# Altium PCB 2018_PanneauDomotiqueSimple.PcbDoc
Units mil, origin at the board's own origin, x right, y up, seen from the top; angles counter-clockwise.
Board outline 2010 x 830 mil, 4 copper layers (1-TOP, 2-SIGNAL, 3-GND, 4-BOT), stack 68 mil thick; 7 components, 5 nets, 17 pads, 2 vias.
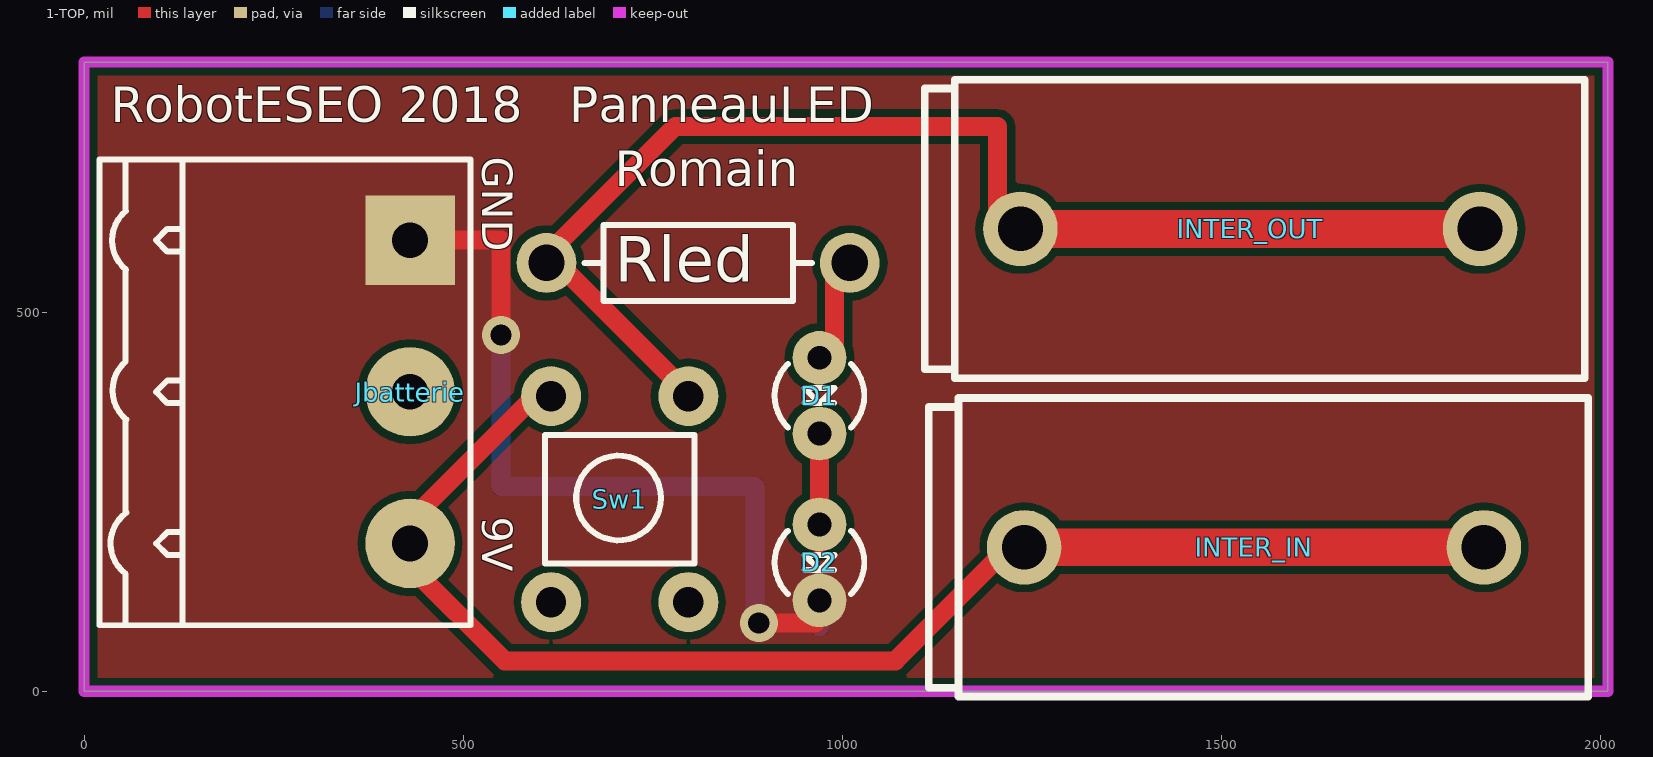
[diagram p0: 1-TOP view]
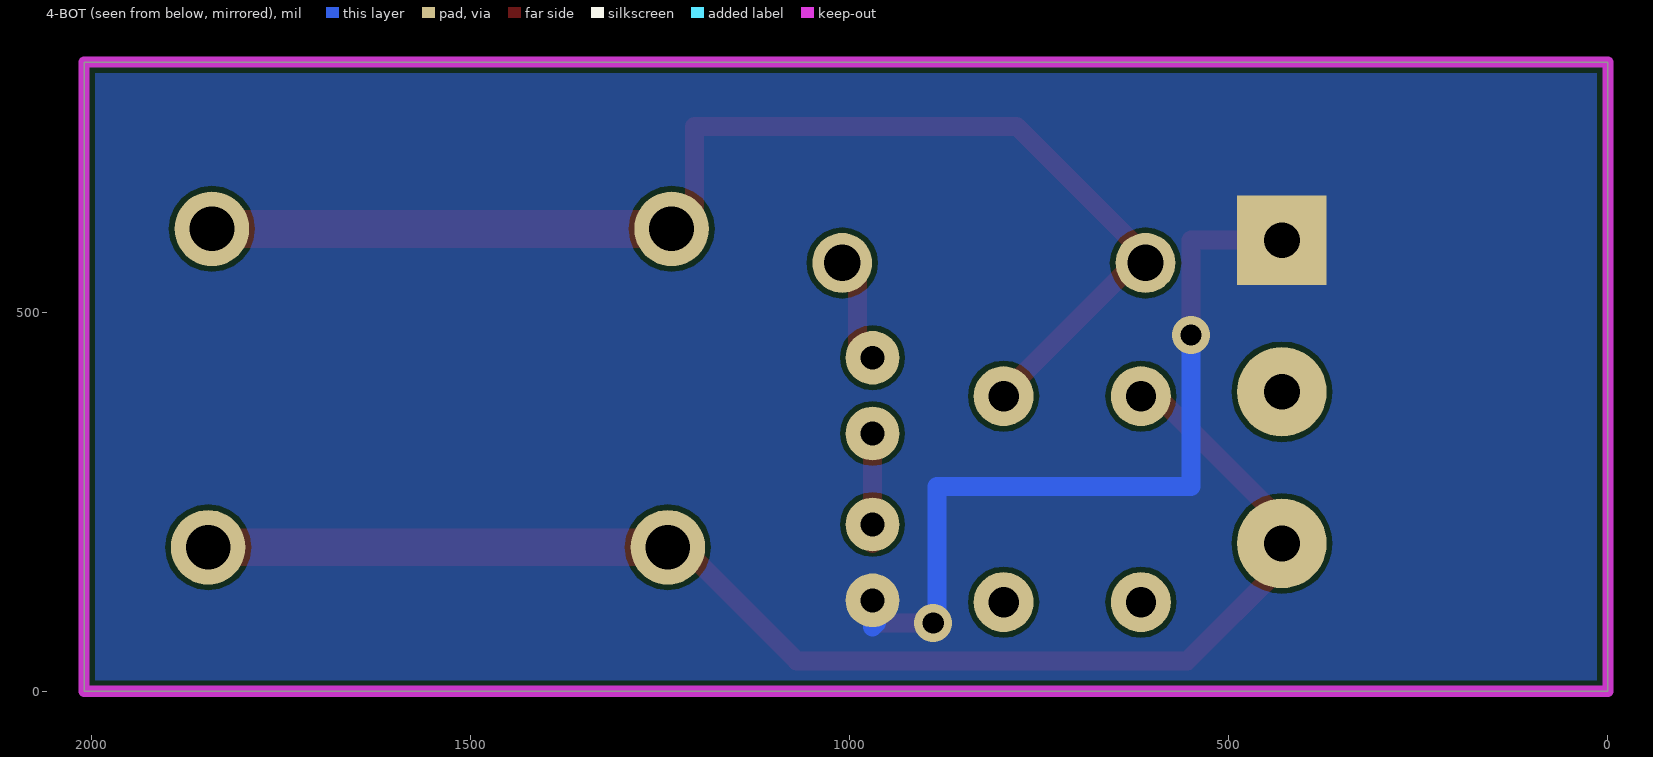
[diagram p1: 4-BOT view, seen from below]
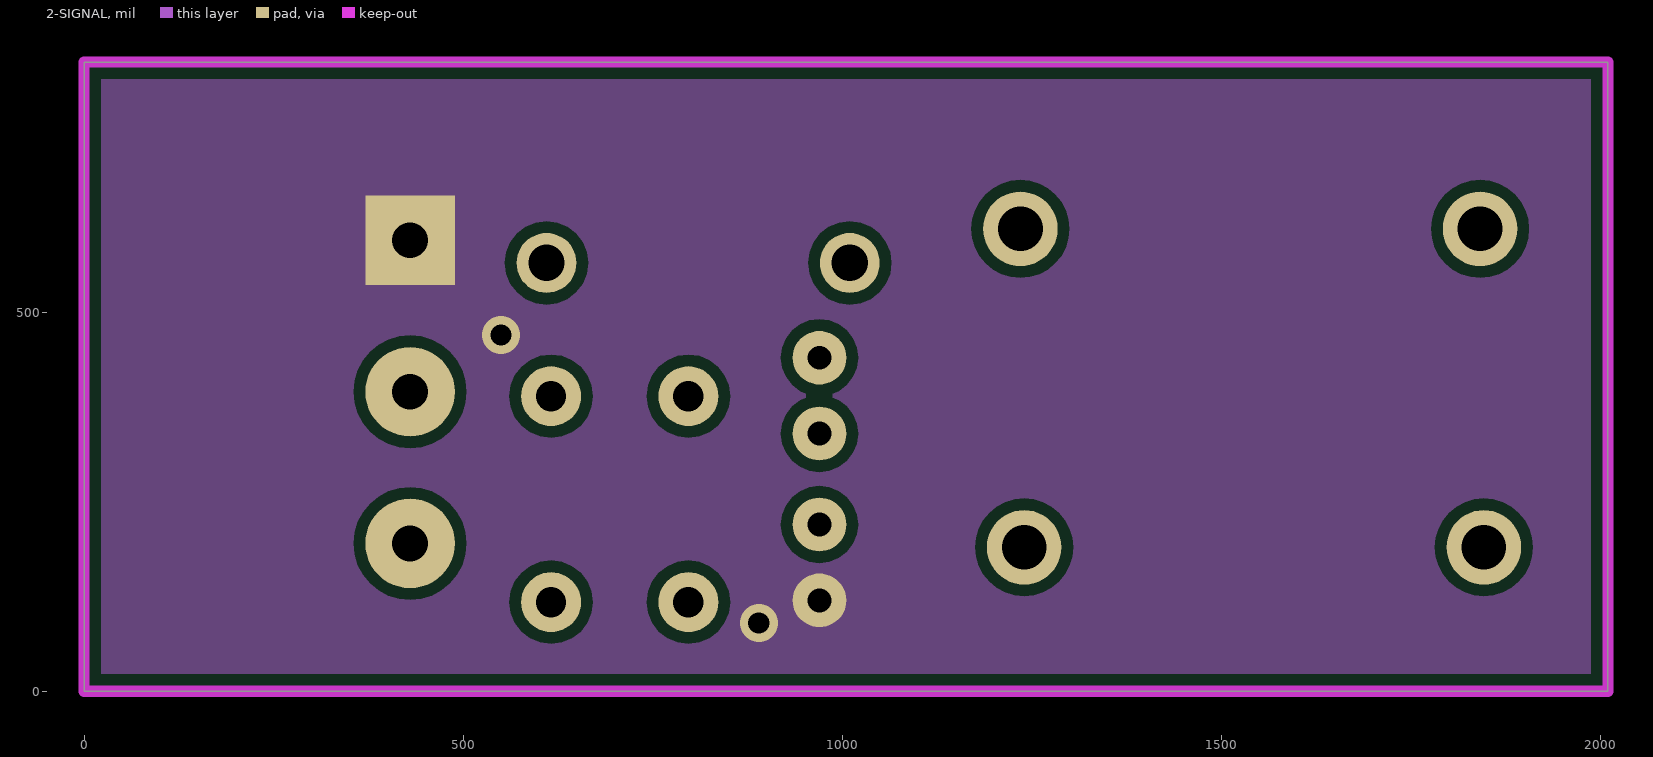
[diagram p2: 2-SIGNAL]
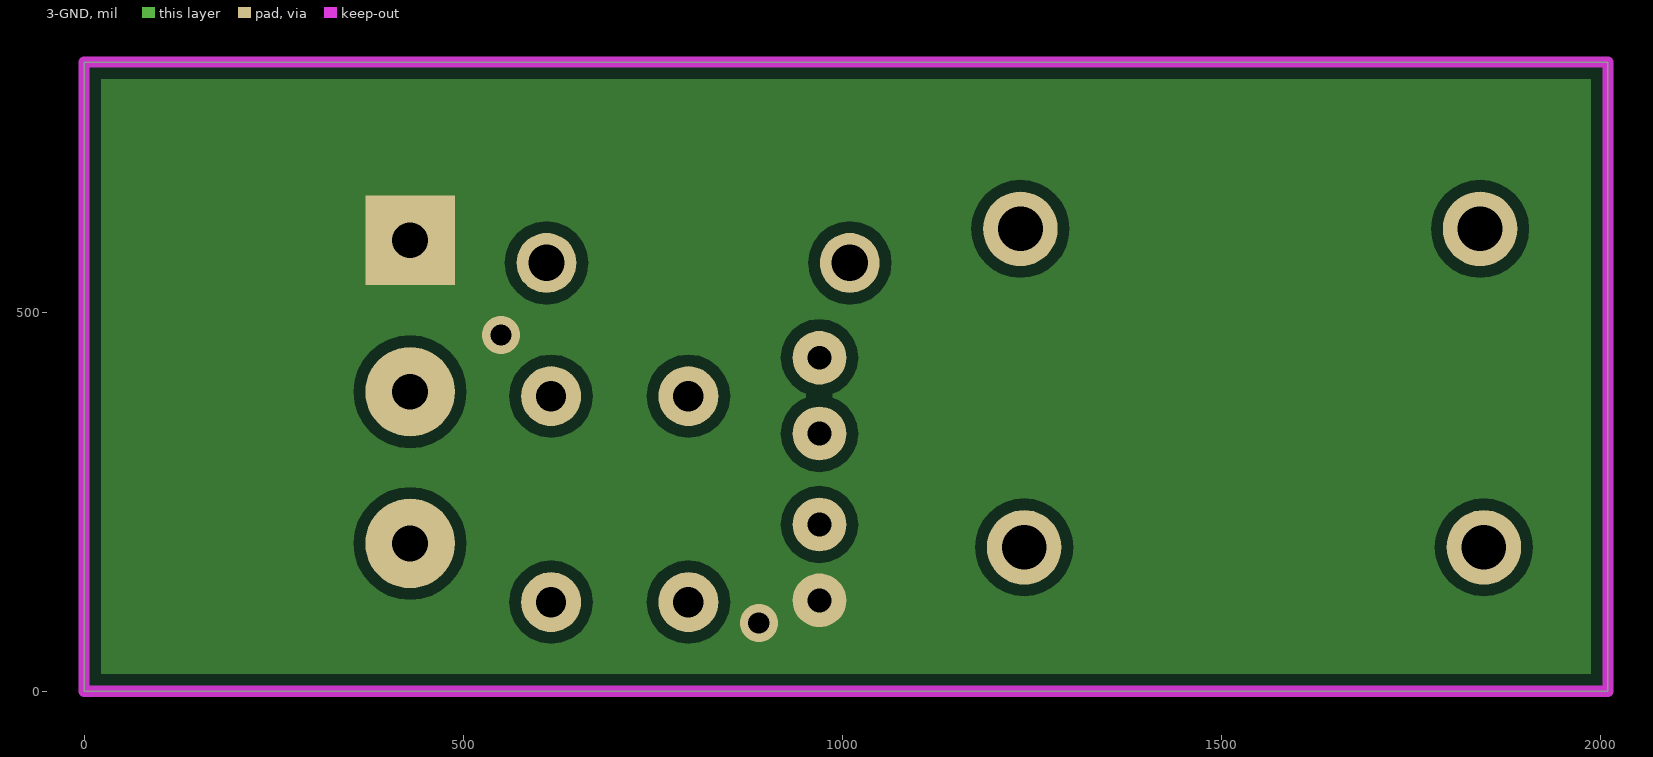
[diagram p3: 3-GND]
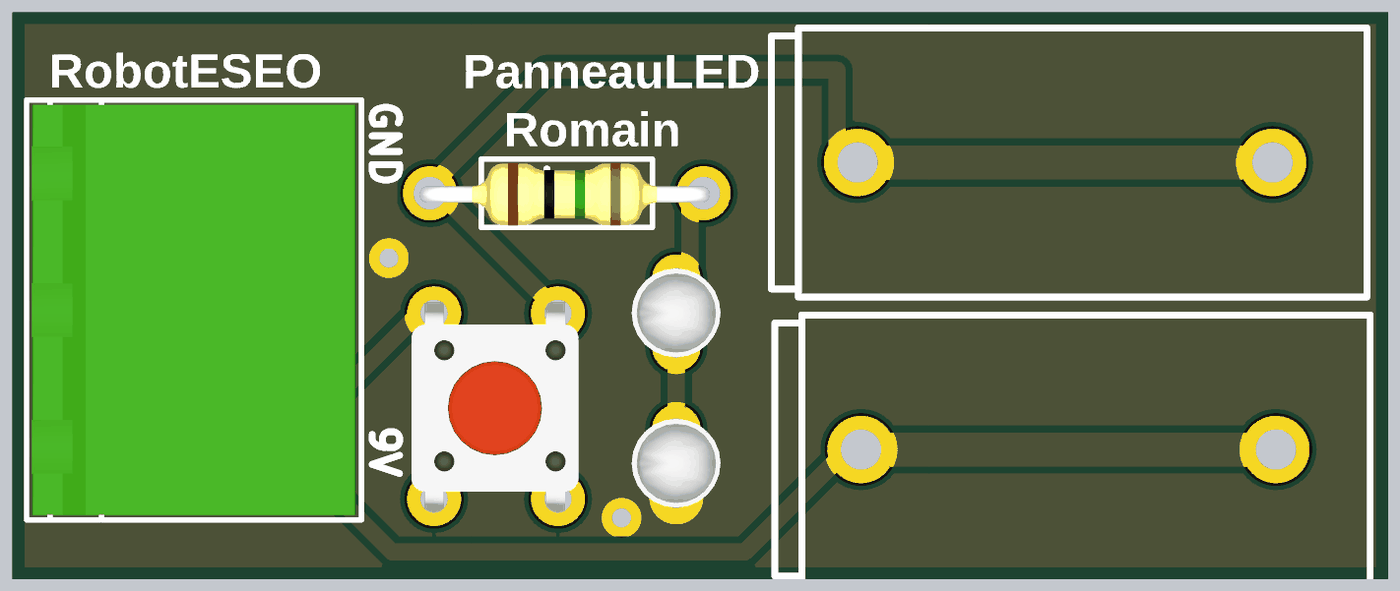
[diagram p4: 3D render of the assembled board from above, using the file's embedded part models]

## Layer stack, top to bottom
Top Solder: solder mask 0.4, Solder Resist, Dk 3.5
1-TOP: signal copper 1.4
Dielectric1: core 20.8, FR-4, Dk 4.8
2-SIGNAL: signal copper 1.4
Dielectric2: prepreg 20.8, FR-4, Dk 4.8
3-GND: signal copper 1.4
Dielectric3: core 20.8, FR-4, Dk 4.8
4-BOT: signal copper 1.4
Bottom Solder: solder mask 0.4, Solder Resist, Dk 3.5

## Board outline
0,0 2010,0 2010,830 0,830

## Design rules (kind name [scope] priority, off if disabled: settings)
Clearance Clearance_4 [InNamedPolygon('GND_TOP') Or  InNamedPolygon('3-GND') Or  InNamedPolygon('2-GND') Or  InNamedPolygon('GND_L04_P008')] p1: gap=15
Clearance Clearance_3 [InNamedPolygon('GND_L04_P008') Or  InNamedPolygon('GND_TOP') Or  InNamedPolygon('2-GND') Or  InNamedPolygon('3-GND')] p2: gap=10
Clearance Clearance_2 [InNamedPolygon('GND_L04_P008') Or  InNamedPolygon('2-GND') Or  InNamedPolygon('3-GND') Or  InNamedPolygon('1-GND') Or  InNamedPolygon('2-GND24')] p3: gap=10
Clearance Clearance_1 [InNamedPolygon('2-GND') Or  InNamedPolygon('3-GND') Or  InNamedPolygon('1-GND') Or  InNamedPolygon('GND_L04_P008')] p4: gap=10
Clearance [All] p5: gap=7
FabricationTestpoint [(IsPad And (OnTopLayer Or OnBottomLayer))] p1: side=3 testpointundercomponent=TRUE minsize=40 maxsize=100 preferedsize=60 minholesize=0 maxholesize=40 preferedholesize=32 testpointgrid=1 allowsidetop=TRUE allowsidebottom=TRUE usegrid=TRUE gridtolerance=0.01
HoleSize [All] p1: absolutevalues=TRUE maxlimit=200 minlimit=1 maxpercent=80.000 minpercent=20.000
PlaneConnect [All] p1: planeconnectstyle=Direct reliefexpansion=20 reliefentries=4 reliefconductorwidth=10 reliefairgap=10
PolygonConnect [All] p1: connectstyle=Direct reliefconductorwidth=10 reliefentries=4 polygonreliefangle="90 Angle" airgapwidth=10
RoomDefinition 2018_PanneauDomotiqueSimple [InComponentClass('2018_PanneauDomotiqueSimple')] p1: confinementstyle=ConfineIn formatcopy=TRUE lockcomponents=FALSE outline 3515,1185 2985,1185 2985,1735 3515,1735
RoutingVias [All] p1: holewidth=28 width=50 viastyle="Through Hole" minholewidth=28 minwidth=50 maxholewidth=28 maxwidth=50
SilkToSolderMaskClearance SilkscreenOverComponentPads [IsPad] p1: minsilkscreentomaskgap=10 clearancetoexposedcopper=TRUE
SolderMaskExpansion [All] p1: expansion=4
Width [All] p1: maxlimit=200 minlimit=10 preferedwidth=15
25 further rules are at their usual default settings.

## Components (designator, comment, footprint, x,y, rotation, side; value= is the part's Value field where it differs from the comment)
D1 "LED_3MM" LED_3MM 970,390 r180 top
D2 "LED_3MM" LED_3MM 970,170 r180 top
INTER_IN "DOUILLE BANANE 4mm COUDEE" DOUILLE_BANANE_4MM_COUDEE 1240,190 r90 top
INTER_OUT "DOUILLE BANANE 4mm COUDEE" DOUILLE_BANANE_4MM_COUDEE 1235,610 r90 top
Jbatterie "BORNIER3 MALE COUDE" BORNIER3_M_C 430,595 r270 top
Rled "RESISTANCE_AXIALE_1/4W" RESISTANCE_1/4W 610,565 r0 top
Sw1 "BOUTON_POUSSOIR_MINIATURE_TRAVERSANT" BOUTON_POUSSE_PLAT_6x6 805,405 r180 top

## Footprints (in the part's own frame and the unit in brackets; to place one, negate y for a bottom-side part, rotate by r counter-clockwise, add the part's x,y. Pads: shape width x height; smd on the part's side, far side on the other; paste and mask are expansions set on the pad)
BORNIER3_M_C [mm] "BORNIER 3 PLOTS ; MALE ; COUDE ; ESPACEMENT BROCHES = 5.08mm"
  rect 3x3 hole 1.2: 1(0,0)
  round 3 hole 1.2: 2(5.08,0) 3(10.16,0)
  silkscreen extent -2.7,-10.4 12.9,2.03, body extent -2.52,-10.2 12.72,1.8, height 8.6
BOUTON_POUSSE_PLAT_6x6 [mil] "BOUTON POUSSOIR MINIATURE ON/OFF; BOUTON PLAT/LONG ; ESPACEMENT BROCHES = 7.62mm/5.08mm"
  round 79 hole 40: 1(7.87,15.75) 2(188.98,15.75) 3(188.98,287.4) 4(7.87,287.4)
  silkscreen extent 0,67 197,236, body extent -22,-1 222,310, height 276
DOUILLE_BANANE_4MM_COUDEE [mm]
  round 2.5 hole 1.5: 1(0,0) 1(0,-15.4)
  silkscreen extent -5,-18.9 5,3.2
LED_3MM [mm] "LED 3mm; 2 Leads"
  round 1.8 hole 0.8: 1(0,-1.27) 2(0,1.27)
  silkscreen extent -1.5,-1.06 1.5,1.06, body extent -1.64,-1.65 1.65,1.65, height 5.51
RESISTANCE_1/4W [mil] "RESISTANCE 0.25W; DIAMETRE : 2.54mm ; LONGUEUR : 6.35mm ; PAS : 10.16mm"
  round 79 hole 48: 1(0,0) 2(400,0)
  silkscreen extent 50,-50 350,50, body extent -15,-47 409,44, height 116

## Part data
D1 D2: "LED 3MM - ROUGE/VERTE/JAUNE"
INTER_IN INTER_OUT: library part DOUILLE_BANANE_4mm_COUDEE, "DOUILLE BANANE 4 mm COUDEE"
Jbatterie: library part BORNIER3_MALE_COUDE, "BORNIER 3 PLOTS MALE COUDE - ENFICHAGE PARALLELE"
Rled: "RESISTANCE TRAVERSANTE AXIALE 1/4W"
Sw1: "BOUTON POUSSOIR MINIATURE TRAVERSANT ON/OFF"

## Via types
v1: diameter 50, hole 28, 1-TOP to 4-BOT, 2 vias

## Nets (pads, with @x,y where several pads share a name; then routed paths per layer and width w, separated by ;. In a path a pad name is that pad's centre, name@x,y a point inside that pad or via, vN(x,y) a via of type N, cw(c..) or ccw(c..) an arc to the next point about the centre after c; other vN are vias at no path point)
BAT: INTER_IN.1 Jbatterie.3 Sw1.2 | length 1797.6
  1-TOP w25: Jbatterie.3@430,190 429.93,189.93 429.93,165.07 554.93,40.07 1070.07,40.07 1208.7,178.7 INTER_IN.1@1208.7,190 ; Jbatterie.3 430,225 595,390 Sw1.2@615,390
  1-TOP w50: INTER_IN.1@1240,190 INTER_IN.1@1830,190
GND: D2.2 Jbatterie.1 | length 1052.1
  1-TOP w25: Jbatterie.1 550,595 v1(550,470) v1@550,465 ; v1@885,90 D2.2@965,90
  4-BOT w25: v1(550,470) 550,270 885,270 v1@885,90 ; D2.2@965,90 D2.2@970,85
  other v1: 890,90
NetD1_1: D1.1 Rled.2 | length 156.2
  1-TOP w25: D1.1 985,455 990,455 990,565 Rled.2
NetD1_2: D1.2 D2.1 | length 145
  1-TOP w25: D2.1@970,195 D1.2
NetINTER_OUT_1: INTER_OUT.1 Rled.1 Sw1.1 | length 1692.1
  1-TOP w25: Rled.1@600,565 780,745 1205,745 INTER_OUT.1@1205,613.7 ; Rled.1 610,555 635,555 790,400 800,400 795,395 Sw1.1@795,390
  1-TOP w50: INTER_OUT.1@1235,610 INTER_OUT.1@1840,610
pads on no net: Jbatterie.2 Sw1.3 Sw1.4

## Polygon pours and split planes (outlines as drawn)
GND on 4-BOT "4-GND" (solid, pour order 7): 10,820 15,815 15,5 2000,5 2000,820
GND on 1-TOP "1-GND" (solid, pour order 8): 20,815 15,810 15,15 1995,15 1995,815
GND on 3-GND "3-GND" (solid, pour order 6): 10,820 15,815 15,5 2000,5 2000,820
GND on 2-SIGNAL "2-GND" (solid, pour order 5): 10,820 15,815 15,5 2000,5 2000,820

## Keep-outs
Keep-Out Layer:
  the board outline again, w15

## Silkscreen, mask and mechanical layers (free items; w line width, h text height)
Top Overlay:
  text "RobotESEO 2018" at 35,735 h80
  text "PanneauLED" at 640,735 h80
  text "GND" at 525,705 h40 r270
  text "Romain" at 700,650 h80
  text "9V" at 525,230 h40 r270